# Altium PCB TG21_mach_nut_nhan _V1_ReV.PcbDoc (part 2 of 5)
Units mm, origin at the board's own origin, x right, y up, seen from the top; angles counter-clockwise.
Board outline 300 x 245 mm, 2 copper layers (Top Layer, Bottom Layer), stack 1.671 mm thick; 534 components, 407 nets, 1677 pads, 2608 vias.
Unrouted connection lines stored in the file: 3.
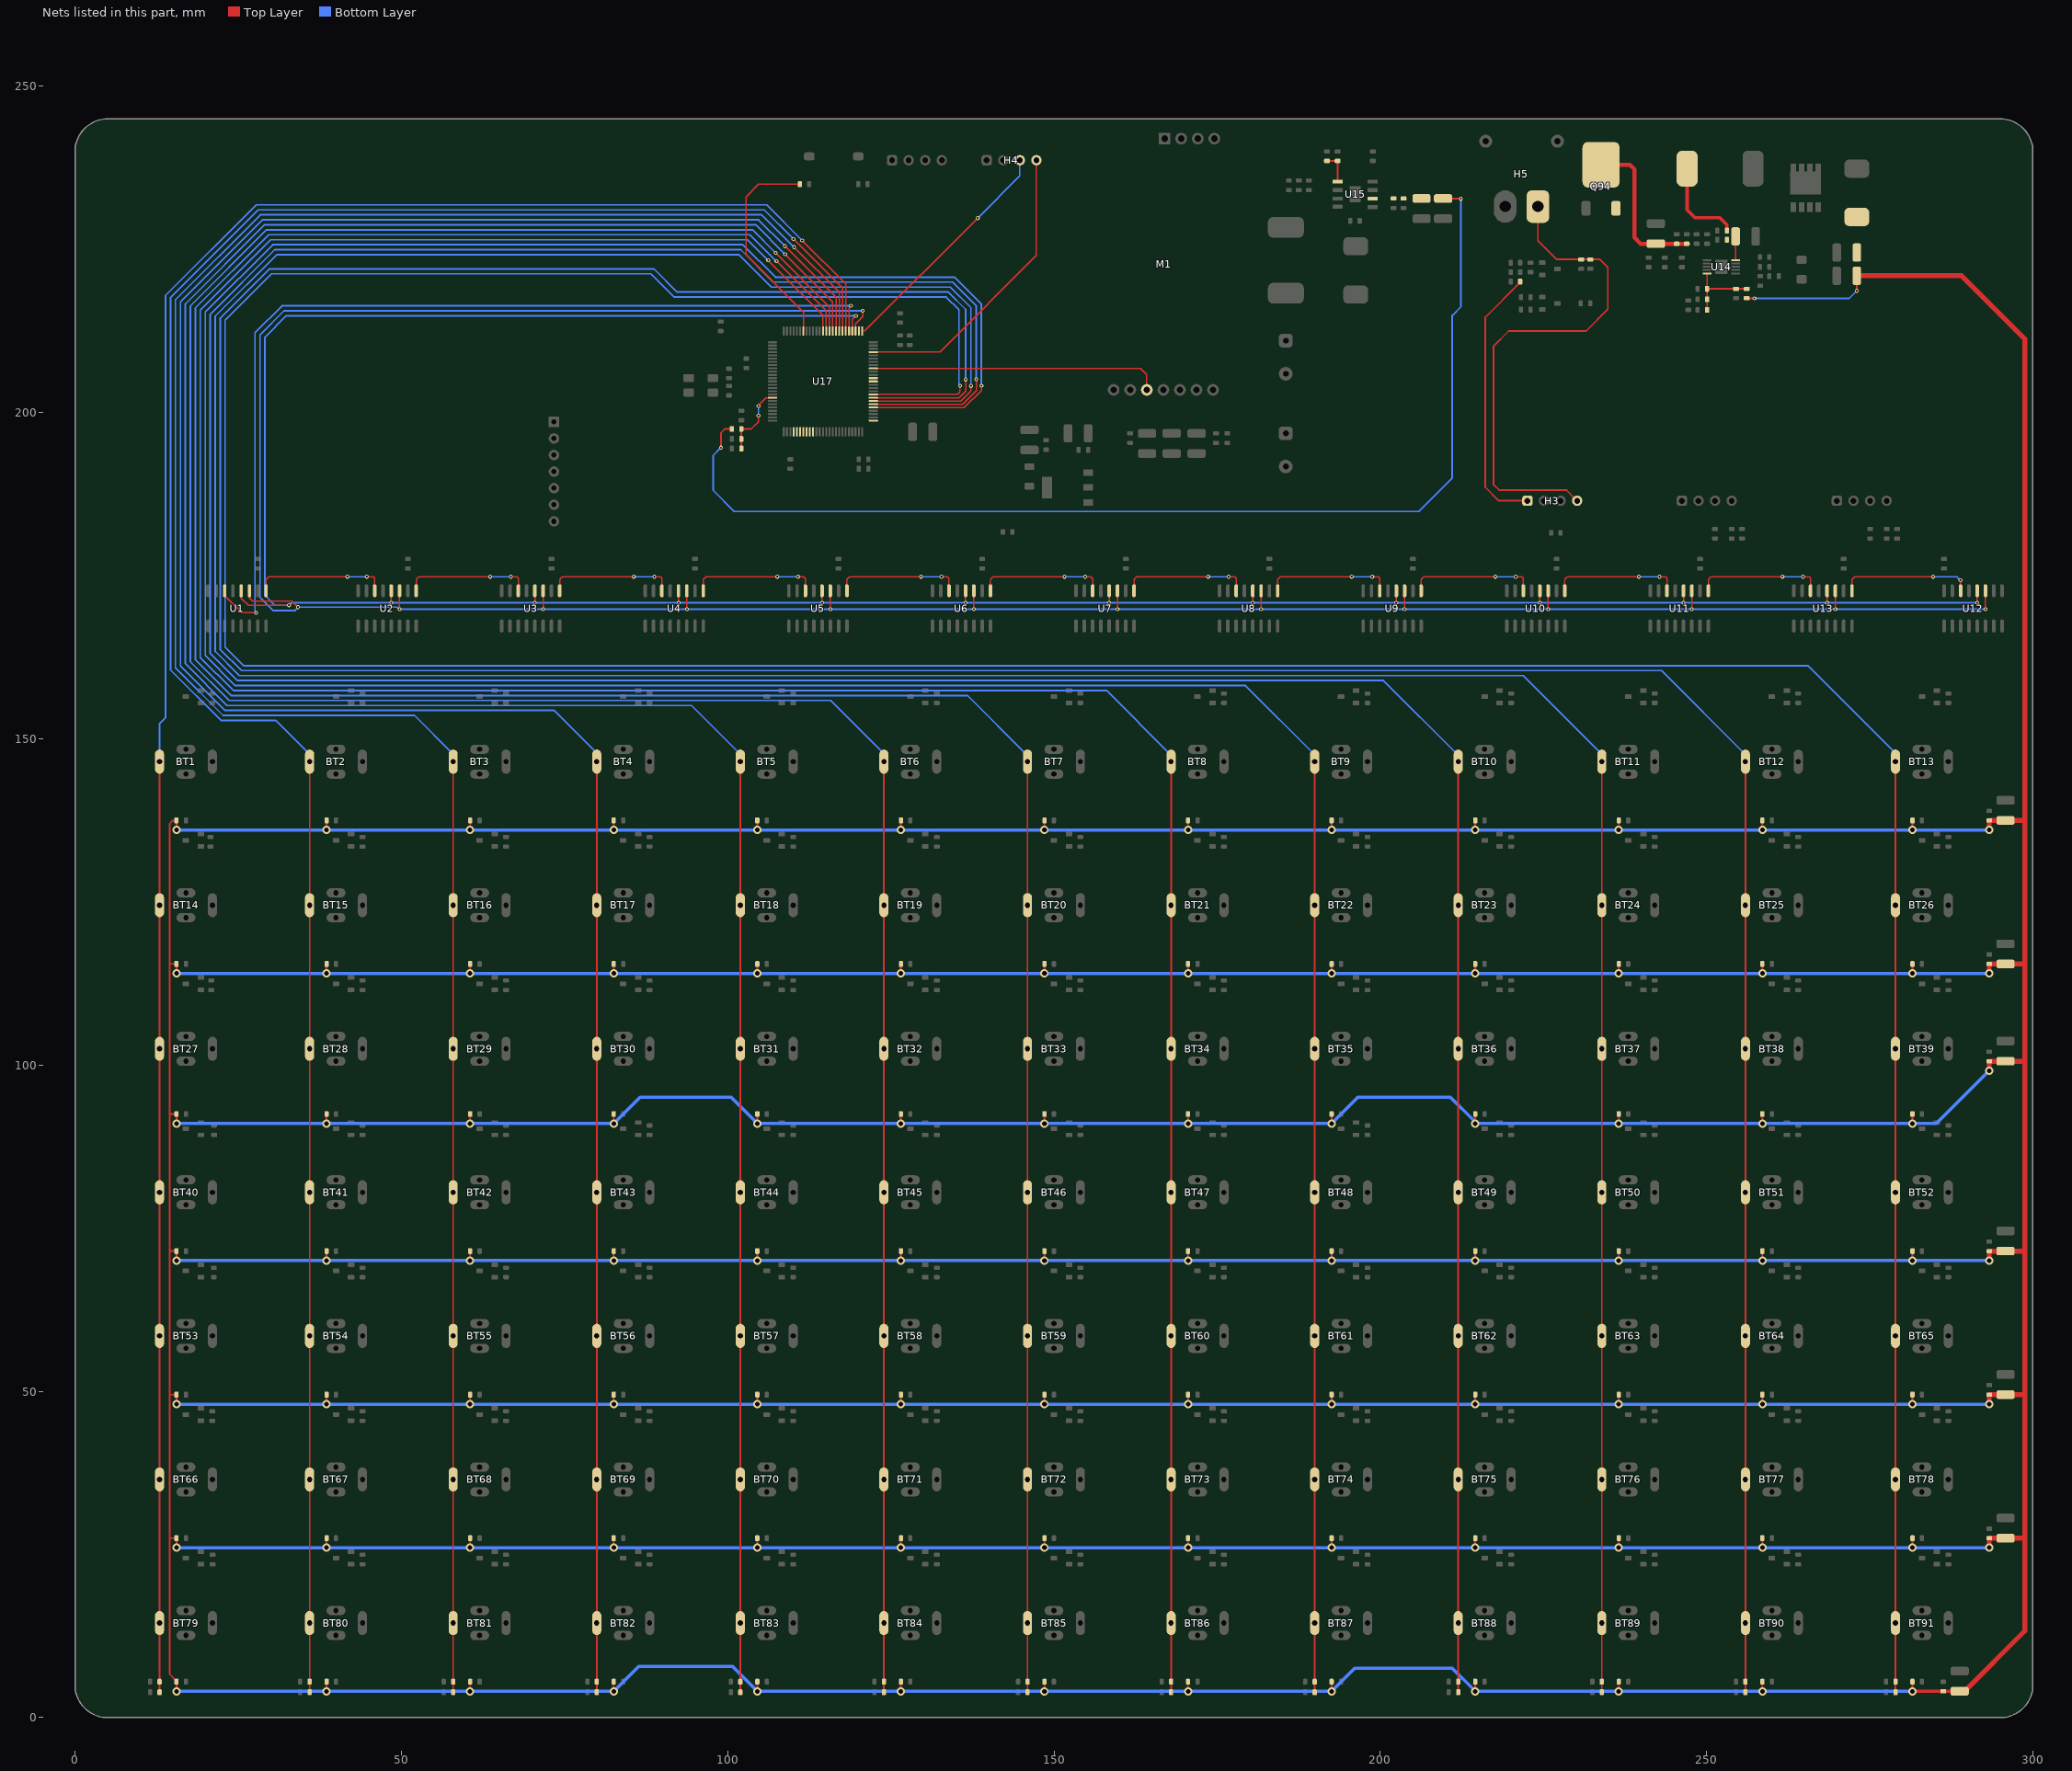
[diagram p2: the nets of this part, all layers, seen from the top]

## Part data
BT1 BT2 BT3 BT4 BT5 BT6 BT7 BT8 BT9 BT10 BT11 BT12 BT13 BT14 BT15 BT16 BT17 BT18 BT19 BT20 BT21 BT22 BT23 BT24 BT25 BT26 BT27 BT28 BT29 BT30 BT31 BT32 BT33 BT34 BT35 BT36 BT37 BT38 BT39 BT40 BT41 BT42 BT43 BT44 BT45 BT46 BT47 BT48 BT49 BT50 BT51 BT52 BT53 BT54 BT55 BT56 BT57 BT58 BT59 BT60 BT61 BT62 BT63 BT64 BT65 BT66 BT67 BT68 BT69 BT70 BT71 BT72 BT73 BT74 BT75 BT76 BT77 BT78 BT79 BT80 BT81 BT82 BT83 BT84 BT85 BT86 BT87 BT88 BT89 BT90 BT91: library part "Metal Push Button Switch", ComponentLink1Description=Link
C1 C2 C3 C4 C5 C6 C7 C8 C9 C10 C11 C12 C13 C14 C15 C16 C17 C18 C19 C20 C21 C22 C23 C24 C25 C26 C34 C35 C36 C37 C38 C39 C40 C41 C42 C43 C46 C47 C50 C52 C58 C61 C64 C67 C69 C72 C74 C75 C77 C78 C80 C82 C83 C84 C85 C86 C89: library part "0603 100nF", "100nF ±10% 50V Ceramic Capacitor X7R 0603", LCSC Part #=C14663, Manufacturer=YAGEO, Mfr. Part #=CC0603KRX7R9BB104, Package=0603, ComponentLink1URL=https://www.lcsc.com/product-detail/C14663.html?s_z=n_0603%2520100nF
  C1 C2 C3 C4 C5 C6 C7 C8 C9 C10 C11 C12 C13 C14 C15 C16 C17 C18 C19 C20 C21 C22 C23 C24 C25 C26 C34 C35 C36 C37 C38 C39 C40: ComponentLink1Description=Link
  C41 C42 C43 C46 C47 C50 C52 C58 C61 C64 C67 C69 C72 C74 C75 C77 C78 C80 C82 C83 C84 C85 C86 C89: ComponentLink1Description="LCSC Link"
C27 C28 C29 C30 C31 C32 C33 C59 C63 C71 C73 C76 C87: library part "1210 22uF 25V X7R", "22uF ±10% 25V Ceramic Capacitor X7R 1210", LCSC Part #=C309062, Manufacturer="Samsung Electro-Mechanics", Mfr. Part #=CL32B226KAJNNNE, Package=1210, ComponentLink1URL=https://www.lcsc.com/product-detail/C309062.html?s_z=n_22uF%25201210
  C27 C28 C29 C30 C31 C32 C33: ComponentLink1Description=Link
  C59 C63 C71 C73 C76 C87: ComponentLink1Description="LCSC Link"
C44 C45 C48 C49: library part "1210 10uF 50V", "10uF ±10% 50V Ceramic Capacitor X7R 1210", LCSC Part #=C138687, Manufacturer="Samsung Electro-Mechanics", Mfr. Part #=CL32B106KBJNNNE, Package=1210, ComponentLink1Description="LCSC Link", ComponentLink1URL=https://www.lcsc.com/product-detail/C138687.html?s_z=n_1210%252010uF
C51 C54 C55 C56 C62: library part "0603 100pF", "100pF ±5% 50V Ceramic Capacitor C0G 0603", LCSC Part #=C14858, Manufacturer="Samsung Electro-Mechanics", Mfr. Part #=CL10C101JB8NNNC, Package=0603, ComponentLink1Description="LCSC Link", ComponentLink1URL=https://www.lcsc.com/product-detail/C14858.html?s_z=n_100pF%25200603&spm=wm.ssy.bg.0.xh&lcsc_vid=FVcIBVBRElIPBFdUFgBYX10HEQJbUQVVQANfV1wFQQcxVlNRQ1RWV1NSQ1dXXjsOAxUeFF5JWBYZEEoKFBINSQcJGk4eFQsCAgIaSgADAwAHC0slRVheUFRSQU8GEwkK
C53 C79 C88: library part "0603 1uF", "1uF ±10% 50V Ceramic Capacitor X5R 0603", LCSC Part #=C15849, Manufacturer="Samsung Electro-Mechanics", Mfr. Part #=CL10A105KB8NNNC, Package=0603, ComponentLink1Description="LCSC Link", ComponentLink1URL=https://www.lcsc.com/product-detail/C15849.html?s_z=n_1uF%25200603%25201%2525&spm=wm.ssy.bg.0.xh&lcsc_vid=FVcIBVBRElIPBFdUFgBYX10HEQJbUQVVQANfV1wFQQcxVlNRQlFeXlNXT1hdUDsOAxUeFF5JWBYZEEoKFBINSQcJGk4%3D
C57: library part "0603 10nF", "10nF ±10% 50V Ceramic Capacitor X7R 0603", LCSC Part #=C100042, Manufacturer=YAGEO, Mfr. Part #=CC0603KRX7R9BB103, Package=0603, ComponentLink1Description="LCSC Link", ComponentLink1URL=https://www.lcsc.com/product-detail/C100042.html?s_z=n_0603%252010nF&spm=wm.ssy.bg.0.xh&lcsc_vid=FVcIBVBRElIPBFdUFgBYX10HEQJbUQVVQANfV1wFQQcxVlNRQlFfVVBSRVNYXjsOAxUeFF5JWBYZEEoKFBINSQcJGk4eFQsCAgIaSgADAwAHC0slRFFaV1JQWQkaCgg%3D
C60 C68: library part "10x20 1000uF 35V", "1000uF 35V Aluminum Electrolytic Capacitors Through Hole,D10xL20mm 2000hrs@105℃", Capacitor=1000uF, LCSC Part #=C136014, Manufacturer=Rubycon, Mfr. Part #=35PX1000MEFC10X20, Package="Through Hole,D10xL20mm", Voltage=35V, Assembly Type="DIP Assembly", ComponentLink1Description="LCSC Link", ComponentLink1URL=https://www.lcsc.com/product-detail/C136014.html?s_z=n_35V%25201000uF%2520rubycon, Type=Capacitor
C65 C66: library part "1210 22uF 25V", "22uF ±10% 25V Ceramic Capacitor X7R 1210", LCSC Part #=C309062, Manufacturer="Samsung Electro-Mechanics", Mfr. Part #=CL32B226KAJNNNE, Package=1210, ComponentLink1Description="LCSC Link", ComponentLink1URL=https://www.lcsc.com/product-detail/C309062.html?s_z=n_22uF%25201210
C70: library part "0603 33pF", "33pF ±5% 50V Ceramic Capacitor NP0 0603", LCSC Part #=C107047, Manufacturer=YAGEO, Mfr. Part #=CC0603JRNPO9BN330, Package=0603, ComponentLink1Description="LCSC Link", ComponentLink1URL=https://www.lcsc.com/product-detail/C107047.html?s_z=n_33pF%25200603&spm=wm.ssy.bg.0.xh&lcsc_vid=FVcIBVBRElIPBFdUFgBYX10HEQJbUQVVQANfV1wFQQcxVlNRQ1RWV1xeR1ZZUTsOAxUeFF5JWBYZEEoKFBINSQcJGk4dAgUUFAk%3D
C81 C90: library part "0603 22pF", "22pF ±5% 50V Ceramic Capacitor C0G 0603", LCSC Part #=C1653, Manufacturer="Samsung Electro-Mechanics", Mfr. Part #=CL10C220JB8NNNC, Package=0603, ComponentLink1Description="LCSC Link", ComponentLink1URL=https://www.lcsc.com/product-detail/C1653.html?s_z=n_22pF%252050V%25200603
D1 D2: library part "B560C - 13- F", "Voltage： 60V Current： 5A", LCSC Part #=C85100, Manufacturer=DIODES, Mfr. Part #=B560C-13-F, Package=SMC(DO-214AB), ComponentLink1Description="LCSC Link", ComponentLink1URL=https://www.lcsc.com/product-detail/C85100.html?s_z=n_B560C
F1: library part "1206 Fuse 1A 6V", "Polymeric PTC Resettable Fuse 6V 1A Surface Mount 1206", LCSC Part #=C883129, Manufacturer=BHFUSE, Mfr. Part #=BSMD1206-100-6V, Package=1206, Assembly Type="SMT Assembly", ComponentLink1Description="LCSC Link", ComponentLink1URL=https://www.lcsc.com/product-detail/C883129.html?s_z=n_q_Resettable%2520Fuse%25206V%25201A%25201206&spm=wm.fly.bg.0.xh&lcsc_vid=QQBdBlYAQFFWUgBXTlUPAgFQQQIIBQIHEQIPAgJRQFAxVlNRT1daVVdeT1JfUzsOAxUeFF5JWBYZEEoKFBINSQcJGk4NBhADEA4cHktXRVZADxALGw%3D%3D, ComponentLink2Description=Datasheet, ComponentLink2URL=NO, Type=Fuse
H1 H2 H3 H4 H7: library part "XH2.54 4PZZ", "XH 1 4P -25℃~+85℃ 2.54mm 4 2A 250V 1x4P Through Hole,P=2.54mm Headers, Male Pins RoHS", LCSC Part #=C53201003, Manufacturer=XYECONN, Package="Through Hole,P=2.54mm", Assembly Type="DIP Assembly", ComponentLink1Description="LCSC Link", ComponentLink1URL=https://www.lcsc.com/product-detail/C53201003.html?s_z=n_XH2.54%25204P, ComponentLink2Description=Datasheet, ComponentLink2URL=https://www.lcsc.com/datasheet/C53201003.pdf, Mfr. Part #=XY-XH2.54-4PZZ, Type=Header
H5: "AMASS XT30PW-M30.G.Y", LCSC Part #=C431092, Manufacturer="Changzhou Amass Elec", Assembly Type="DIP Assembly", ComponentLink1Description="LCSC Link", ComponentLink1URL=https://www.lcsc.com/product-detail/C431092.html?s_z=n_q_xt30pw&spm=wm.fly.bg.0.xh&lcsc_vid=QQBdBlYAQFFWUgBXTlUPAgFQQQIIBQIHEQIPAgJRQFAxVlNRT1ddX1xWQlNaUzsOAxUeFF5JWBYZEEoKFBINSQcJGk4eFQsCAgIaSgADAwAHC0slQllfX11TQk8GEwkK, ComponentLink2Description=Datasheet, ComponentLink2URL=https://www.lcsc.com/datasheet/C431092.pdf?spm=wm.sxq.inf.ggs___wm.fly.bg.0.xh&lcsc_vid=QQBdBlYAQFFWUgBXTlUPAgFQQQIIBQIHEQIPAgJRQFAxVlNRT1ddX1xWQlNaUzsOAxUeFF5JWBYZEEoKFBINSQcJGk4eFQsCAgIaSgADAwAHC0slQllfX11TQk8GEwkK, Mfr. Part #=XT30PW-M30.G.Y, Type=Connector/Header
H6: "Cắm", Chung_Loai=Cắm, Don_Vi=Con, Ma_Hang=MH003369, Ten_Linh_Kien="Header 7P XH2.54-7P Đực Thẳng"
L1 L2: library part "CDRH127N 10uH", "5.4A 10uH 21.6mΩ ±20% SMD,12.2x12.2mm Fixed Inductors RoHS", LCSC Part #=C2832085, Manufacturer=MINGSTAR, Mfr. Part #=CDRH127N-100M, Package=SMD,12.2x12.2mm, ComponentLink1Description="LCSC Link", ComponentLink1URL=http://lcsc.com/product-detail/C2832085.html?s_z=n_CDRH127
M1: "8km UART Through Hole RF Transceiver Modules and Modems RoHS", LCSC Part #=C97351, Manufacturer=EBYTE, Mfr. Part #=E32-433T30D, Package="Through Hole", ComponentLink1Description="LCSC Link", ComponentLink1URL=https://www.lcsc.com/product-detail/C97351.html?s_z=n_E32%2520433T30D, ComponentLink2Description=Datasheet, ComponentLink2URL=https://www.lcsc.com/datasheet/C97351.pdf, Type=Module
Q1 Q2 Q3 Q4 Q5 Q6 Q7 Q8 Q9 Q10 Q11 Q12 Q13 Q14 Q15 Q16 Q17 Q18 Q19 Q20 Q21 Q22 Q23 Q24 Q25 Q26 Q27 Q28 Q29 Q30 Q31 Q32 Q33 Q34 Q35 Q36 Q37 Q38 Q39 Q40 Q41 Q42 Q43 Q44 Q45 Q46 Q47 Q48 Q49 Q50 Q51 Q52 Q53 Q54 Q55 Q56 Q57 Q58 Q59 Q60 Q61 Q62 Q63 Q64 Q65 Q66 Q67 Q68 Q69 Q70 Q71 Q72 Q73 Q74 Q75 Q76 Q77 Q78 Q79 Q80 Q81 Q82 Q83 Q84 Q85 Q86 Q87 Q88 Q89 Q90 Q91: "N-Channel 60V 3A 1.25W Surface Mount SOT-23", LCSC Part #=C347491, Manufacturer=UMW, Package=SOT-23, Assembly=SMT, Category=SI2308A, ComponentLink1Description=Link, ComponentLink1URL=https://www.lcsc.com/product-detail/C347491.html?s_z=n_q_si2308&spm=wm.fly.bg.1.xh&lcsc_vid=Q1VfX1ReRFFaUFJSRgIIUV0CFFgIBFJfT1hdVlwEEVkxVlNRT1daUlxeQlReVzsOAxUeFF5JWBYZEEoKFBINSQcJGk4NBhADEA4cHktXQFFADxALGw%3D%3D, Key Attributes="MOSFET N-CH 60V 3A SOT-23", Mfr. Part #=SI2308A, Type=Mosfet, Unit=Pcs
Q92: library part TPH3R70, LCSC Part #=C556308, Manufacturer=TOSHIBA, Package=SO-8, ComponentLink1Description="LCSC Link", ComponentLink1URL=https://www.lcsc.com/product-detail/C556308.html?s_z=n_tph3R70, Mfr. Part #=TPH3R70APL
Q93 Q95: library part MMBT2222A, "Bipolar (BJT) Transistor NPN 20V 350mA 300MHz 300mW Surface Mount SOT-23", LCSC Part #=C916372, Manufacturer=JSMSEMI, Package=SOT-23, ComponentLink1Description="LCSC Link", ComponentLink1URL=https://www.lcsc.com/product-detail/C916372.html?s_z=n_mmbt222&spm=wm.ssy.bg.4.xh&lcsc_vid=FVcIBVBRElIPBFdUFgBYX10HEQJbUQVVQANfV1wFQQcxVlNRQ1hYVFJVRlldXjsOAxUeFF5JWBYZEEoKFBINSQcJGk4dAgUUFAk%3D, Mfr. Part #=MMBT2222A
Q94: library part IRFR5410TRPBF, "P-Channel 100V 13A 66W Surface Mount DPAK(TO-252AA)", LCSC Part #=C3018, Manufacturer=Infineon, Package=DPAK(TO-252AA), ComponentLink1Description="LCSC Link", ComponentLink1URL=https://www.lcsc.com/product-detail/C3018.html?s_z=n_IRFR5410TRPBF, Mfr. Part #=IRFR5410TRPBF
R1 R2 R3 R4 R5 R6 R7 R8 R9 R10 R11 R12 R13 R27 R28 R29 R30 R31 R32 R33 R34 R35 R36 R37 R38 R39 R53 R54 R55 R56 R57 R58 R59 R60 R61 R62 R63 R64 R65 R79 R80 R81 R82 R83 R84 R85 R86 R87 R88 R89 R90 R91 R105 R106 R107 R108 R109 R110 R111 R112 R113 R114 R115 R116 R117 R131 R132 R133 R134 R135 R136 R137 R138 R139 R140 R141 R142 R143 R157 R158 R159 R160 R161 R162 R163 R164 R165 R166 R167 R168 R169 R197 R199 R200: library part "0603 220R", "100mW 220Ω 75V Thick Film Resistor ±1% ±100ppm/℃ 0603 Chip Resistor - Surface Mount RoHS", LCSC Part #=C313707, Manufacturer=VISHAY, Mfr. Part #=CRCW0603220RFKEAHP, Package=0603, ComponentLink1URL=https://www.lcsc.com/product-detail/C313707.html?s_z=n_0603%2520220R
  R1 R2 R3 R4 R5 R6 R7 R8 R9 R10 R11 R12 R13 R27 R28 R29 R30 R31 R32 R33 R34 R35 R36 R37 R38 R39 R53 R54 R55 R56 R57 R58 R59 R60 R61 R62 R63 R64 R65 R79 R80 R81 R82 R83 R84 R85 R86 R87 R88 R89 R90 R91 R105 R106 R107 R108 R109 R110 R111 R112 R113 R114 R115 R116 R117 R131 R132 R133 R134 R135 R136 R137 R138 R139 R140 R141 R142 R143 R157 R158 R159 R160 R161 R162 R163 R164 R165 R166 R167 R168 R169: ComponentLink1Description=Link
  R197 R199 R200: ComponentLink1Description="LCSC Link"
R14 R15 R16 R17 R18 R19 R20 R21 R22 R23 R24 R25 R26 R40 R41 R42 R43 R44 R45 R46 R47 R48 R49 R50 R51 R52 R66 R67 R68 R69 R70 R71 R72 R73 R74 R75 R76 R77 R78 R92 R93 R94 R95 R96 R97 R98 R99 R100 R101 R102 R103 R104 R118 R119 R120 R121 R122 R123 R124 R125 R126 R127 R128 R129 R130 R144 R145 R146 R147 R148 R149 R150 R151 R152 R153 R154 R155 R156 R170 R171 R172 R173 R174 R175 R176 R177 R178 R179 R180 R181 R182 R183 R184 R185 R186 R187 R188 R189 R190 R191 R192 R193 R194 R195 R196 R198 R205 R207 R213 R215 R218 R222 R223 R224: library part "0603 10K", "100mW 10kΩ 75V Thick Film Resistor ±1% ±100ppm/℃ 0603 Chip Resistor - Surface Mount RoHS", LCSC Part #=C844918, Manufacturer=VISHAY, Mfr. Part #=CRCW060310K0FKEA, Package=0603, ComponentLink1URL=https://www.lcsc.com/product-detail/C844918.html?s_z=n_10K
  R14 R15 R16 R17 R18 R19 R20 R21 R22 R23 R24 R25 R26 R40 R41 R42 R43 R44 R45 R46 R47 R48 R49 R50 R51 R52 R66 R67 R68 R69 R70 R71 R72 R73 R74 R75 R76 R77 R78 R92 R93 R94 R95 R96 R97 R98 R99 R100 R101 R102 R103 R104 R118 R119 R120 R121 R122 R123 R124 R125 R126 R127 R128 R129 R130 R144 R145 R146 R147 R148 R149 R150 R151 R152 R153 R154 R155 R156 R170 R171 R172 R173 R174 R175 R176 R177 R178 R179 R180 R181 R182 R183 R184 R185 R186 R187 R188 R189 R190 R191 R192 R193 R194 R195: ComponentLink1Description=Link
  R196 R198 R205 R207 R213 R215 R218 R222 R223 R224: ComponentLink1Description="LCSC Link"
R201 R206: library part "0603 100K", "100mW 100KΩ 75V Thick Film Resistor ±1% ±100ppm/℃ 0603 Chip Resistor - Surface Mount RoHS", LCSC Part #=C2906980, Manufacturer=FOJAN, Mfr. Part #=FRC0603F1003TS, Package=0603, ComponentLink1Description="LCSC Link", ComponentLink1URL=https://www.lcsc.com/product-detail/C2906980.html?s_z=n_0603%25201%2525%2520100K
R202 R211 R214: library part "0603 150K", "100mW 150KΩ 75V Thick Film Resistor ±1% ±100ppm/℃ 0603 Chip Resistor - Surface Mount RoHS", LCSC Part #=C22807, Manufacturer=UNI-ROYAL, Mfr. Part #=0603WAF1503T5E, Package=0603, ComponentLink1Description="LCSC Link", ComponentLink1URL=https://www.lcsc.com/product-detail/C22807.html?s_z=n_0603%25201%2525%2520150K
R203 R220: library part "0603 2.2R", "100mW 2.2Ω 75V Thick Film Resistor ±1% ±100ppm/℃ 0603 Chip Resistor - Surface Mount RoHS", LCSC Part #=C2933402, Manufacturer=FOJAN, Mfr. Part #=FRC0805F2R20TS, Package=0603, ComponentLink1Description="LCSC Link", ComponentLink1URL=https://www.lcsc.com/product-detail/C2933402.html?s_z=n_2.2R%25201%2525&spm=wm.ssy.bg.6.xh&lcsc_vid=FVcIBVBRElIPBFdUFgBYX10HEQJbUQVVQANfV1wFQQcxVlNRQ1hYUFNVRlVWUzsOAxUeFF5JWBYZEEoKFBINSQcJGk4dAgUUFAk%3D
R204 R216 R217 R221: library part "0603 1K", "100mW 1kΩ 75V Thick Film Resistor ±1% ±100ppm/℃ 0603 Chip Resistor - Surface Mount RoHS", LCSC Part #=C844920, Manufacturer=VISHAY, Mfr. Part #=CRCW06031K00FKEA, Package=0603, ComponentLink1Description="LCSC Link", ComponentLink1URL=https://www.lcsc.com/product-detail/C844920.html?s_z=n_0603%25201K
R208: library part "0603 3K", "3kΩ ±1% 100mW 0603 Thick Film Resistor", LCSC Part #=C17817, Manufacturer=UNI-ROYAL, Mfr. Part #=0805W8F7503T5E, Package=0603, Assembly Type="SMT Assembly", ComponentLink1Description="LCSC Link", ComponentLink1URL=https://www.lcsc.com/product-detail/C2907033.html?s_z=n_3K%25201%2525%25200603&spm=wm.ssy.bg.0.xh&lcsc_vid=FVcIBVBRElIPBFdUFgBYX10HEQJbUQVVQANfV1wFQQcxVlNRQVBYUlZWRlRaUjsOAxUeFF5JWBYZEEoKFBINSQcJGk4dAgUUFAk%3D, ComponentLink2Description=Datasheet, ComponentLink2URL=https://www.lcsc.com/datasheet/C2907033.pdf?spm=wm.sxq.inf.ggs___wm.ssy.bg.0.xh&lcsc_vid=FVcIBVBRElIPBFdUFgBYX10HEQJbUQVVQANfV1wFQQcxVlNRQVBYUlZWRlRaUjsOAxUeFF5JWBYZEEoKFBINSQcJGk4dAgUUFAk%3D, Type=Resistor
R209: library part "0603 30K", "30kΩ ±1% 100mW 0603 Thick Film Resistor", LCSC Part #=C2907025, Manufacturer=FOJAN, Mfr. Part #=FRC0603F3002TS, Package=0603, Assembly Type="SMT Assembly", ComponentLink1Description="LCSC Link", ComponentLink1URL=https://www.lcsc.com/product-detail/C2907025.html?s_z=n_q_t_0603%252030K&spm=wm.fly.bg.0.xh___wm.ssy.tc.0.tz&lcsc_vid=QQBdBlYAQFFWUgBXTlUPAgFQQQIIBQIHEQIPAgJRQFAxVlNRT1daV1JVTlhbUzsOAxUeFF5JWBYZEEoKFBINSQcJGk4dAgUUFAk%3D, ComponentLink2Description=Datasheet, ComponentLink2URL=https://www.lcsc.com/datasheet/C2907025.pdf?spm=wm.sxq.inf.ggs___wm.fly.bg.0.xh&lcsc_vid=QQBdBlYAQFFWUgBXTlUPAgFQQQIIBQIHEQIPAgJRQFAxVlNRT1daV1JVTlhbUzsOAxUeFF5JWBYZEEoKFBINSQcJGk4dAgUUFAk%3D, Type=Resistor
R210 R212: library part "0603 5.6K", "100mW 5.6KΩ 75V Thick Film Resistor ±1% ±100ppm/℃ 0603 Chip Resistor - Surface Mount RoHS", LCSC Part #=C2907046, Manufacturer=FOJAN, Mfr. Part #=FRC0603F5601TS, Package=0603, ComponentLink1Description="LCSC Link", ComponentLink1URL=https://www.lcsc.com/product-detail/C2907046.html?s_z=n_5.6K%25200603&spm=wm.ssy.bg.0.xh&lcsc_vid=FVcIBVBRElIPBFdUFgBYX10HEQJbUQVVQANfV1wFQQcxVlNRQ1RWV1FeQVlfVDsOAxUeFF5JWBYZEEoKFBINSQcJGk4eFQsCAgIaSgADAwAHC0slQ1VdUFNIHxUDCw%3D%3D
R219: library part "0603 220K", "100mW 220KΩ 75V Thick Film Resistor ±1% ±100ppm/℃ 0603 Chip Resistor - Surface Mount RoHS", LCSC Part #=C2907013, Manufacturer=FOJAN, Mfr. Part #=FRC0603F2203TS, Package=0603, ComponentLink1Description="LCSC Link", ComponentLink1URL=https://www.lcsc.com/product-detail/C2907013.html?s_z=n_0603%25201%2525%2520220K
R225: library part "0603 0R", "100mW 0Ω 75V Thick Film Resistor ±1% ±100ppm/℃ 0603 Chip Resistor - Surface Mount RoHS", LCSC Part #=C100044, Manufacturer=YAGEO, Mfr. Part #=RC0603FR-070RL, Package=0603, ComponentLink1Description="LCSC Link", ComponentLink1URL=https://www.lcsc.com/product-detail/C100044.html?s_z=n_0R%25201%2525%25200603&spm=wm.ssy.bg.1.xh&lcsc_vid=FVcIBVBRElIPBFdUFgBYX10HEQJbUQVVQANfV1wFQQcxVlNRQ1RWVFVVRFVbUzsOAxUeFF5JWBYZEEoKFBINSQcJGk4dAgUUFAk%3D
RSNS1: library part "1206 25mR", "1W 25mΩ ±50ppm/℃ ±1% 1206 Chip Resistor - Surface Mount RoHS", LCSC Part #=C46634441, Manufacturer=JIERR, Mfr. Part #=JER1206F1R025, Package=1206, ComponentLink1Description="LCSC Link", ComponentLink1URL=https://www.lcsc.com/product-detail/C46634441.html?s_z=n_25mR%25201W&spm=wm.ssy.bg.1.stp&lcsc_vid=FVcIBVBRElIPBFdUFgBYX10HEQJbUQVVQANfV1wFQQcxVlNRQVBYVlFWT1lXVzsOAxUeFF5JWBYZEEoKFBINSQcJGk4eFQsCAgIaSgADAwAHC0slRlVZVVxIHxUDCw%3D%3D, ComponentLink2Description=Datasheet, ComponentLink2URL=https://www.lcsc.com/datasheet/C46634441.pdf?spm=wm.sxq.inf.ggs___wm.ssy.bg.1.stp&lcsc_vid=FVcIBVBRElIPBFdUFgBYX10HEQJbUQVVQANfV1wFQQcxVlNRQVBYVlFWT1lXVzsOAxUeFF5JWBYZEEoKFBINSQcJGk4eFQsCAgIaSgADAwAHC0slRlVZVVxIHxUDCw%3D%3D
SW1: library part "Switch Tactile 3x6x2.5", "Tactile Switch SPST 250gf 2.5mm SMD (SMT) Tab 6mm x 3.6mm Surface Mount", LCSC Part #=C36498960, Manufacturer=hanxia, Package=SMD,6x3mm, Assembly Type="SMT Assembly", ComponentLink1Description="LCSC Link", ComponentLink1URL=https://www.lcsc.com/product-detail/C36498960.html?s_z=n_q_p_3x6x2.5&spm=wm.ssy.bg.0.xh&lcsc_vid=QQBdBlYAQFFWUgBXTlUPAgFQQQIIBQIHEQIPAgJRQFAxVlNRT1daU1NWQVBbVTsOAxUeFF5JWBYZEEoKFBINSQcJGk4NBhADEA4cHktXRVZADxALGw%3D%3D, ComponentLink2Description=Datasheet, ComponentLink2URL=https://www.lcsc.com/datasheet/C36498960.pdf?spm=wm.sxq.inf.ggs___wm.ssy.bg.0.xh&lcsc_vid=QQBdBlYAQFFWUgBXTlUPAgFQQQIIBQIHEQIPAgJRQFAxVlNRT1daU1NWQVBbVTsOAxUeFF5JWBYZEEoKFBINSQcJGk4NBhADEA4cHktXRVZADxALGw%3D%3D, Mfr. Part #="HX 3x6x2.5A-2.5N", Type=Switch
U1 U2 U3 U4 U5 U6 U7 U8 U9 U10 U11 U12 U13: "2V~6V 1 100ns@5V,50pF Serial-to-Serial or Parallel SOP-16 Shift Registers RoHS", LCSC Part #=C18164493, Manufacturer=GR, Mfr. Part #=74HC595, Package=SOP-16, Assembly=SMT, categoty=74HC595, ComponentLink1Description=Link, ComponentLink1URL=https://www.lcsc.com/product-detail/C18164493.html?s_z=n_q_x_74hc595&spm=wm.ssy.em.0.tz&lcsc_vid=Q1VfX1ReRFFaUFJSRgIIUV0CFFgIBFJfT1hdVlwEEVkxVlNRT1ddX1RVRFFcVjsOAxUeFF5JWBYZEEoKFBINSQcJGk4%3D, Key Attributes="8-bit CMOS shift register", Type=IC, Unit=Pcs
U14: library part TPS40210DGQR, "1 MSOP-10-EP DC DC Switching Controllers RoHS", LCSC Part #=C14728, Manufacturer=TI, Package=MSOP-10-EP, Assembly Type="SMT Assembly", ComponentLink1Description="LCSC Link", ComponentLink1URL=https://www.lcsc.com/product-detail/C14728.html?s_z=n_TPS40210&spm=wm.ssy.bg.0.xh&lcsc_vid=FVcIBVBRElIPBFdUFgBYX10HEQJbUQVVQANfV1wFQQcxVlNRQVBbX1FeRllYUDsOAxUeFF5JWBYZEEoKFBINSQcJGk4dAgUUFAk%3D, ComponentLink2Description=Datasheet, ComponentLink2URL=https://www.lcsc.com/datasheet/C14728.pdf?spm=wm.sxq.inf.ggs___wm.ssy.bg.0.xh&lcsc_vid=FVcIBVBRElIPBFdUFgBYX10HEQJbUQVVQANfV1wFQQcxVlNRQVBbX1FeRllYUDsOAxUeFF5JWBYZEEoKFBINSQcJGk4dAgUUFAk%3D, Mfr. Part #=TPS40210DGQR, Type=IC
U15: library part TPS54360, "60V Input, 3.5A Output Step-Down DC-DC Converter", LCSC Part #=C44377, Manufacturer=TI, Package=SOIC-8-EP, ComponentLink1Description="LCSC Link", ComponentLink1URL=https://www.lcsc.com/product-detail/C44377.html?s_z=n_tps54360&spm=wm.ssy.bg.0.xh&lcsc_vid=FVcIBVBRElIPBFdUFgBYX10HEQJbUQVVQANfV1wFQQcxVlNRQ1RWV1ZTTlRdVzsOAxUeFF5JWBYZEEoKFBINSQcJGk4dAgUUFAk%3D, Mfr. Part #=TPS54360DDAR
U16: library part AMS1117, "1.2A Fixed 3.3V Positive 15V SOT-223 Voltage Regulators - Linear, Low Drop Out (LDO) Regulators ROHS"
X1: library part "Crystal 5032 4P 8MhZ", "Crystal 8MHz ±20ppm 12pF SMD5032-4P", LCSC Part #=C5181482, Manufacturer=SOSET, Mfr. Part #="5032 8M 12PF 20PPM 4P", Package=SMD5032-4P, ComponentLink1Description="LCSC Link", ComponentLink1URL=https://www.lcsc.com/product-detail/C5181482.html?s_z=n_5032%25208m

## Via types
v1: diameter 0.6, hole 0.3, Top Layer to Bottom Layer, tented both sides, 2488 vias
v2: diameter 1.27, hole 0.711, Top Layer to Bottom Layer, tented both sides, 97 vias
v3: diameter 0.7, hole 0.3, Top Layer to Bottom Layer, tented both sides, 23 vias

## Nets (pads, with @x,y where several pads share a name; then routed paths per layer and width w, separated by ;. In a path a pad name is that pad's centre, name@x,y a point inside that pad or via, vN(x,y) a via of type N, cw(c..) or ccw(c..) an arc to the next point about the centre after c; other vN are vias at no path point)
+24VDC: C27.2 C28.2 C29.2 C30.2 C31.2 C32.2 C33.2 C34.2 C35.2 C36.2 C37.2 C38.2 C39.2 C40.2 C44.2 C45.2 D1.2 R1.1 R2.1 R3.1 R4.1 R5.1 R6.1 R7.1 R8.1 R9.1 R10.1 R11.1 R12.1 R13.1 R27.1 R28.1 R29.1 R30.1 R31.1 R32.1 R33.1 R34.1 R35.1 R36.1 R37.1 R38.1 R39.1 R53.1 R54.1 R55.1 R56.1 R57.1 R58.1 R59.1 R60.1 R61.1 R62.1 R63.1 R64.1 R65.1 R79.1 R80.1 R81.1 R82.1 R83.1 R84.1 R85.1 R86.1 R87.1 R88.1 R89.1 R90.1 R91.1 R105.1 R106.1 R107.1 R108.1 R109.1 R110.1 R111.1 R112.1 R113.1 R114.1 R115.1 R116.1 R117.1 R131.1 R132.1 R133.1 R134.1 R135.1 R136.1 R137.1 R138.1 R139.1 R140.1 R141.1 R142.1 R143.1 R157.1 R158.1 R159.1 R160.1 R161.1 R162.1 R163.1 R164.1 R165.1 R166.1 R167.1 R168.1 R169.1 R206.2 | length 2530.5
  Top Layer w0.25: R206.2@256.154,217.515 257.312,217.515 v1(257.327,217.5) ; v1(273.025,218.669) C44.2@273.025,220.962
  Top Layer w0.254: v2(15.543,4.041) 15.55,4.041 R157.1@15.55,5.5 15.55,5.625 14.503,6.672 14.503,27.521 ; v2(15.543,26.041) 15.55,26.041 R131.1@15.55,27.5 14.524,27.5 14.503,27.521 ; v2(15.543,48.041) 15.55,48.041 R105.1@15.55,49.5 14.523,49.5 14.503,49.519 ; v2(15.543,70.041) 15.55,70.041 R79.1@15.55,71.5 14.514,71.5 14.503,71.489 ; v2(15.543,91.045) 15.55,91.045 R53.1@15.55,92.503 14.518,92.503 14.503,92.488 ; v2(15.543,114.041) 15.55,114.041 R27.1@15.55,115.5 14.506,115.5 14.503,115.498 ; v2(15.543,136.041) 15.55,136.041 R1.1@15.55,137.5 15.515,137.465 14.961,137.465 14.503,137.008 14.503,115.498 ; R158.1@38.55,5.5 38.55,4.041 v2(38.558,4.041) ; R132.1@38.55,27.5 38.55,26.041 v2(38.558,26.041) ; R106.1@38.55,49.5 38.55,48.041 v2(38.558,48.041) ; R80.1@38.55,71.5 38.55,70.041 v2(38.558,70.041) ; R54.1@38.55,92.503 38.55,91.045 v2(38.558,91.045) ; R28.1@38.55,115.5 38.55,114.041 v2(38.558,114.041) ; R2.1@38.55,137.5 38.55,136.041 v2(38.558,136.041) ; v2(60.54,4.041) 60.55,4.041 R159.1@60.55,5.5 ; v2(60.54,26.041) 60.55,26.041 R133.1@60.55,27.5 ; v2(60.54,48.041) 60.55,48.041 R107.1@60.55,49.5 ; v2(60.54,70.041) 60.55,70.041 R81.1@60.55,71.5 ; v2(60.54,91.045) 60.55,91.045 R55.1@60.55,92.503 ; v2(60.54,114.041) 60.55,114.041 R29.1@60.55,115.5 ; v2(60.54,136.041) 60.55,136.041 R3.1@60.55,137.5 ; R160.1@82.55,5.5 82.55,4.041 v2(82.564,4.041) ; R134.1@82.55,27.5 82.55,26.041 v2(82.564,26.041) ; R108.1@82.55,49.5 82.55,48.041 v2(82.564,48.041) ; R82.1@82.55,71.5 82.55,70.041 v2(82.564,70.041) ; R56.1@82.55,92.503 82.55,91.045 v2(82.564,91.045) ; R30.1@82.55,115.5 82.55,114.041 v2(82.564,114.041) ; R4.1@82.55,137.5 82.55,136.041 v2(82.564,136.041) ; R161.1@104.55,5.5 104.55,4.041 v2(104.556,4.041) ; R135.1@104.55,27.5 104.55,26.041 v2(104.556,26.041) ; R109.1@104.55,49.5 104.55,48.041 v2(104.556,48.041) ; R83.1@104.55,71.5 104.55,70.041 v2(104.556,70.041) ; R57.1@104.55,92.503 104.55,91.045 v2(104.556,91.045) ; R31.1@104.55,115.5 104.55,114.041 v2(104.556,114.041) ; R5.1@104.55,137.5 104.55,136.041 v2(104.556,136.041) ; v2(126.541,4.041) 126.55,4.041 R162.1@126.55,5.5 ; v2(126.541,26.041) 126.55,26.041 R136.1@126.55,27.5 ; v2(126.541,48.041) 126.55,48.041 R110.1@126.55,49.5 ; v2(126.541,70.041) 126.55,70.041 R84.1@126.55,71.5 ; v2(126.541,91.045) 126.55,91.045 R58.1@126.55,92.503 ; v2(126.541,114.041) 126.55,114.041 R32.1@126.55,115.5 ; v2(126.541,136.041) 126.55,136.041 R6.1@126.55,137.5 ; R163.1@148.55,5.5 148.55,4.041 v2(148.553,4.041) ; R137.1@148.55,27.5 148.55,26.041 v2(148.553,26.041) ; R111.1@148.55,49.5 148.55,48.041 v2(148.553,48.041) ; R85.1@148.55,71.5 148.55,70.041 v2(148.553,70.041) ; R59.1@148.55,92.503 148.55,91.045 v2(148.553,91.045) ; R33.1@148.55,115.5 148.55,114.041 v2(148.553,114.041) ; R7.1@148.55,137.5 148.55,136.041 v2(148.553,136.041) ; R164.1@170.55,5.5 170.55,4.041 v2(170.559,4.041) ; R138.1@170.55,27.5 170.55,26.041 v2(170.559,26.041) ; R112.1@170.55,49.5 170.55,48.041 v2(170.559,48.041) ; R86.1@170.55,71.5 170.55,70.041 v2(170.559,70.041) ; R60.1@170.55,92.503 170.55,91.045 v2(170.559,91.045) ; R34.1@170.55,115.5 170.55,114.041 v2(170.559,114.041) ; R8.1@170.55,137.5 170.55,136.041 v2(170.559,136.041) ; R165.1@192.55,5.5 192.55,4.041 v2(192.555,4.041) ; R139.1@192.55,27.5 192.55,26.041 v2(192.555,26.041) ; R113.1@192.55,49.5 192.55,48.041 v2(192.555,48.041) ; R87.1@192.55,71.5 192.55,70.041 v2(192.555,70.041) ; R61.1@192.55,92.503 192.55,91.045 v2(192.555,91.045) ; R35.1@192.55,115.5 192.55,114.041 v2(192.555,114.041) ; R9.1@192.55,137.5 192.55,136.041 v2(192.555,136.041) ; R166.1@214.55,5.5 214.55,4.041 v2(214.552,4.041) ; R140.1@214.55,27.5 214.55,26.041 v2(214.552,26.041) ; R114.1@214.55,49.5 214.55,48.041 v2(214.552,48.041) ; R88.1@214.55,71.5 214.55,70.041 v2(214.552,70.041) ; R62.1@214.55,92.503 214.55,91.045 v2(214.552,91.045) ; R36.1@214.55,115.5 214.55,114.041 v2(214.552,114.041) ; R10.1@214.55,137.5 214.55,136.041 v2(214.552,136.041) ; v2(236.548,4.041) 236.55,4.041 R167.1@236.55,5.5 ; v2(236.548,26.041) 236.55,26.041 R141.1@236.55,27.5 ; v2(236.548,48.041) 236.55,48.041 R115.1@236.55,49.5 ; v2(236.548,70.041) 236.55,70.041 R89.1@236.55,71.5 ; v2(236.548,91.045) 236.55,91.045 R63.1@236.55,92.503 ; v2(236.548,114.041) 236.55,114.041 R37.1@236.55,115.5 ; v2(236.548,136.041) 236.55,136.041 R11.1@236.55,137.5 ; v2(258.545,4.041) 258.55,4.041 R168.1@258.55,5.5 ; v2(258.545,26.041) 258.55,26.041 R142.1@258.55,27.5 ; v2(258.545,48.041) 258.55,48.041 R116.1@258.55,49.5 ; v2(258.545,70.041) 258.55,70.041 R90.1@258.55,71.5 ; v2(258.545,91.045) 258.55,91.045 R64.1@258.55,92.503 ; v2(258.545,114.041) 258.55,114.041 R38.1@258.55,115.5 ; v2(258.545,136.041) 258.55,136.041 R12.1@258.55,137.5 ; R169.1@281.55,5.5 281.557,5.5 v2(281.557,4.041) ; R143.1@281.55,27.5 281.557,27.5 v2(281.557,26.041) ; R117.1@281.55,49.5 281.557,49.5 v2(281.557,48.041) ; R91.1@281.55,71.5 281.557,71.5 v2(281.557,70.041) ; R65.1@281.55,92.503 281.557,92.503 v2(281.557,91.045) ; R39.1@281.55,115.5 281.557,115.5 v2(281.557,114.041) ; R13.1@281.55,137.5 281.557,137.5 v2(281.557,136.041) ; C33.2@288.774,4.041 C33.2@289.519,4.041 ; 298.755,100.6 298.755,100.607 ; 298.755,115.508 298.755,115.545 ; 14.503,27.521 14.503,49.519 ; 14.503,49.519 14.503,71.489 ; 14.503,71.489 14.503,92.488 ; 14.503,92.488 14.503,115.498
  Top Layer w0.5: v2(281.557,4.041) C40.2@286.27,4.041 C33.2@288.774,4.041 ; 298.755,49.5 298.755,49.509 ; 298.755,71.5 298.755,71.513
  Top Layer w0.762: C44.2@273.025,220.962 289.07,220.962 298.755,211.277 298.755,137.5 ; C33.2@289.519,4.041 298.755,13.277 298.755,27.5 ; v2(293.306,26.041) C39.2@293.306,27.5 C32.2@295.81,27.5 298.755,27.5 ; v2(293.306,48.041) C38.2@293.306,49.5 C31.2@295.81,49.5 298.755,49.5 298.755,27.5 ; v2(293.306,70.041) C37.2@293.306,71.5 C30.2@295.81,71.5 298.755,71.5 298.755,49.509 ; v2(293.306,99.141) C36.2@293.306,100.6 C29.2@295.81,100.6 298.755,100.6 298.755,71.513 ; v2(293.306,114.041) C35.2@293.306,115.5 C28.2@295.81,115.5 ; v2(293.306,136.041) C34.2@293.306,137.5 C27.2@295.81,137.5 298.755,137.5 ; C28.2@295.818,115.508 298.755,115.508 298.755,100.607 ; 298.755,115.545 298.755,137.5
  Bottom Layer w0.25: v1(257.327,217.5) 271.856,217.5 v1(273.025,218.669)
  Bottom Layer w0.5: v2(15.543,4.041) v2(38.558,4.041) v2(60.54,4.041) v2(82.564,4.041) 86.346,7.823 100.774,7.823 v2(104.556,4.041) v2(126.541,4.041) v2(148.553,4.041) v2(170.559,4.041) v2(192.555,4.041) 196.083,7.569 211.024,7.569 v2(214.552,4.041) v2(236.548,4.041) v2(258.545,4.041) v2(281.557,4.041) ; v2(15.543,26.041) v2(38.558,26.041) v2(60.54,26.041) v2(82.564,26.041) v2(104.556,26.041) v2(126.541,26.041) v2(148.553,26.041) v2(170.559,26.041) v2(192.555,26.041) v2(214.552,26.041) v2(236.548,26.041) v2(258.545,26.041) v2(281.557,26.041) v2(293.306,26.041) ; v2(15.543,48.041) v2(38.558,48.041) v2(60.54,48.041) v2(82.564,48.041) v2(104.556,48.041) v2(126.541,48.041) v2(148.553,48.041) v2(170.559,48.041) v2(192.555,48.041) v2(214.552,48.041) v2(236.548,48.041) v2(258.545,48.041) v2(281.557,48.041) v2(293.306,48.041) ; v2(15.543,70.041) v2(38.558,70.041) v2(60.54,70.041) v2(82.564,70.041) v2(104.556,70.041) v2(126.541,70.041) v2(148.553,70.041) v2(170.559,70.041) v2(192.555,70.041) v2(214.552,70.041) v2(236.548,70.041) v2(258.545,70.041) v2(281.557,70.041) v2(293.306,70.041) ; v2(15.543,91.045) v2(38.558,91.045) v2(60.54,91.045) v2(82.564,91.045) 86.591,95.072 100.529,95.072 v2(104.556,91.045) v2(126.541,91.045) v2(148.553,91.045) v2(170.559,91.045) v2(192.555,91.045) 196.583,95.072 210.744,95.072 214.552,91.264 v2(214.552,91.045) v2(236.548,91.045) v2(258.545,91.045) v2(281.557,91.045) 285.209,91.045 v2(293.306,99.141) ; v2(15.543,114.041) v2(38.558,114.041) v2(60.54,114.041) v2(82.564,114.041) v2(104.556,114.041) v2(126.541,114.041) v2(148.553,114.041) v2(170.559,114.041) v2(192.555,114.041) v2(214.552,114.041) v2(236.548,114.041) v2(258.545,114.041) v2(281.557,114.041) v2(293.306,114.041) ; v2(15.543,136.041) v2(38.558,136.041) v2(60.54,136.041) v2(82.564,136.041) v2(104.556,136.041) v2(126.541,136.041) v2(148.553,136.041) v2(170.559,136.041) v2(192.555,136.041) v2(214.552,136.041) v2(236.548,136.041) v2(258.545,136.041) v2(281.557,136.041) v2(293.306,136.041)
A: U17.29
A1: U1.11 U2.11 U3.11 U4.11 U5.11 U6.11 U7.11 U8.11 U9.11 U10.11 U11.11 U12.11 U13.11 U17.78 | length 443.4
  Top Layer w0.178: U1.11@26.735,172.699 26.76,172.673 26.76,171.589 27.229,171.12 33.228,171.12 v1(34.163,170.185) ; U2.11@49.735,172.474 49.735,169.866 v1(49.749,169.866) ; v1(71.732,169.866) 71.735,169.866 U3.11@71.735,172.474 ; 93.735,171.699 93.75,171.683 93.75,169.866 v1(93.762,169.866) ; U5.11@115.735,172.474 115.735,169.866 v1(115.748,169.866) ; U17.78@119.605,212.5 119.605,213.585 120.701,214.681 v1(120.701,215.595) ; U6.11@137.735,172.474 137.735,169.866 v1(137.744,169.866) ; U7.11@159.735,172.474 159.735,169.866 v1(159.741,169.866) ; U8.11@181.735,172.474 181.735,169.866 v1(181.74,169.866) ; v1(203.733,169.866) U9.11@203.735,172.474 ; v1(225.73,169.866) 225.735,169.866 U10.11@225.735,172.474 ; v1(247.726,169.866) 247.735,169.866 U11.11@247.735,172.474 ; v1(269.731,169.866) 269.735,169.866 U13.11@269.735,172.474 ; v1(292.735,169.866) U12.11@292.735,172.699
  Bottom Layer w0.254: v1(120.701,215.595) 32.023,215.595 28.346,211.919 28.346,171.668 30.348,169.666 33.738,169.666 34.163,170.091 34.163,170.282 34.26,170.185 49.336,170.185 49.655,169.866 v1(71.732,169.866) v1(93.762,169.866) v1(115.748,169.866) v1(137.744,169.866) v1(159.741,169.866) v1(181.74,169.866) v1(203.733,169.866) v1(225.73,169.866) v1(247.726,169.866) v1(269.731,169.866) v1(292.735,169.866)
A2: U1.12 U2.12 U3.12 U4.12 U5.12 U6.12 U7.12 U8.12 U9.12 U10.12 U11.12 U12.12 U13.12 U17.79 | length 428.2
  Top Layer w0.178: U1.12@25.465,172.699 25.465,171.535 25.518,171.481 26.582,170.477 v1(32.791,170.477) ; U2.12@48.465,172.699 48.465,170.866 v1(48.479,170.866) ; v1(70.462,170.866) 70.465,170.866 U3.12@70.465,172.699 ; U4.12@92.465,172.699 92.48,172.699 92.48,170.866 v1(92.492,170.866) ; U5.12@114.465,172.699 114.465,170.866 v1(114.478,170.866) ; U17.79@119.105,212.5 119.101,212.504 119.101,214.287 119.647,214.833 v1(119.659,214.833) ; U6.12@136.465,172.699 136.465,170.866 v1(136.474,170.866) ; U7.12@158.465,172.699 158.465,170.866 v1(158.471,170.866) ; U8.12@180.465,172.699 180.465,170.866 v1(180.47,170.866) ; v1(202.463,170.866) U9.12@202.465,172.699 ; v1(224.46,170.866) 224.465,170.866 U10.12@224.465,172.699 ; v1(246.456,170.866) 246.465,170.866 U11.12@246.465,172.699 ; v1(268.461,170.866) 268.465,170.866 U13.12@268.465,172.699 ; v1(291.465,170.866) U12.12@291.465,172.699
  Bottom Layer w0.254: v1(32.791,170.477) 30.615,170.477 29.108,171.983 29.108,211.557 32.385,214.833 v1(119.659,214.833) ; v1@32.799,170.477 33.188,170.866 v1(48.479,170.866) v1(70.462,170.866) v1(92.492,170.866) v1(114.478,170.866) v1(136.474,170.866) v1(158.471,170.866) v1(180.47,170.866) v1(202.463,170.866) v1(224.46,170.866) v1(246.456,170.866) v1(268.461,170.866) v1(291.465,170.866)
A3: U1.14 U17.80 | length 146.7
  Top Layer w0.178: U1.14@22.925,172.699 22.925,171.974 25.581,169.318 v1(27.757,169.316) ; U17.80@118.605,212.5 118.605,215.976 118.897,216.268 v1(118.897,216.383)
  Bottom Layer w0.254: v1(27.757,169.316) 27.757,169.41 27.584,169.583 27.584,212.235 31.707,216.357 118.872,216.357 v1(118.897,216.383)
ADC_BAT: C77.1 R213.1 R214.1 U17.18 | length 11.2
  Top Layer w0.178: v1(104.724,201.016) 104.724,201.117 105.882,202.275 U17.18@106.88,202.275
  Top Layer w0.254: R213.1@102.097,194.488 C77.1@102.097,195.961 R214.1@102.097,197.485 103.607,197.485 104.724,198.603 v1(104.724,199.542)
  Bottom Layer w0.254: v1(104.724,199.542) v1(104.724,201.016)
AUX1: M1.5 U17.67 | length 44.6
  Top Layer w0.178: U17.67@122.33,206.775 163.252,206.775 164.224,205.803 M1.5@164.224,203.486
AUX2: U17.51
B: U17.30
BAT: H3.1 R215.1 | length 41
  Top Layer w0.254: R215.1@221.439,220.065 221.439,219.94 216.103,214.604 216.103,188.544 218.161,186.487 H3.1@222.555,186.487
BAT+: C78.2 H3.4 H5.1 Q94.3 R219.2 | length 79
  Top Layer w0.254: H5.1@224.154,231.579 224.154,226.366 227.051,223.469 R219.2@230.791,223.469 C78.2@232.183,223.469 233.655,223.469 234.874,222.25 234.874,215.824 231.546,212.496 219.685,212.496 217.373,210.185 217.373,188.951 218.211,188.112 228.549,188.112 H3.4@230.175,186.487
BAT_EN: C43.1 C48.2 C49.2 C50.1 C52.2 C63.1 C64.1 C71.1 C72.2 L1.1 Q94.2 R201.1 R214.2 U14.10 U15.2 | length 216.2
  Top Layer w0.254: v1(98.98,194.619) 98.984,194.623 98.984,196.901 99.568,197.485 R214.2@100.647,197.485 ; C71.1@209.629,232.801 209.647,232.783 212.352,232.783 v1(212.369,232.766) ; C48.2@254.441,227 254.452,226.989 U14.10@254.452,223.337
  Top Layer w0.5: L1.1@247.02,237.388 247.02,231.059 248.183,229.895 251.993,229.895 253.107,228.781 C43.1@253.107,227.882
  Top Layer w0.635: Q94.2@233.832,237.978 238.246,237.978 238.938,237.287 238.938,226.822 239.882,225.877 C49.2@242.234,225.877 C50.1@245.409,225.877 R201.1@246.959,225.877
  Bottom Layer w0.254: v1(98.98,194.619) 98.98,194.611 97.79,193.421 97.79,188.069 101.023,184.836 205.892,184.836 211.023,189.967 211.023,214.884 212.369,216.23 v1(212.369,232.766)
BOOT0: R224.2 U17.94 | length 33.3
  Top Layer w0.178: R224.2@111.056,235.001 104.751,235.001 102.793,233.043 102.793,224.193 111.605,215.381 U17.94@111.605,212.5
BUZZER: U17.77
C: U17.31
C1: BT1.1 BT14.1 BT27.1 BT40.1 BT53.1 BT66.1 BT79.1 C14.2 R183.1 U17.81 | length 336.6
  Top Layer w0.178: v1(111.425,226.371) 118.107,219.689 118.107,212.502 U17.81@118.105,212.5
  Top Layer w0.254: BT1.1@12.95,146.5 BT14.1@12.95,124.5 BT27.1@12.95,102.5 BT40.1@12.95,80.5 BT53.1@12.95,58.5 BT66.1@12.95,36.5 BT79.1@12.95,14.5 12.951,14.499 12.951,3.895 C14.2@12.952,3.894
  Bottom Layer w0.254: BT1.1@12.95,146.5 12.95,152.298 13.868,153.217 13.868,217.916 27.778,231.826 105.971,231.826 v1(111.425,226.371)
C2: BT2.1 BT15.1 BT28.1 BT41.1 BT54.1 BT67.1 BT80.1 C15.2 R184.1 U17.82 | length 347.6
  Top Layer w0.178: v1(110.079,226.6) 117.605,219.074 U17.82@117.605,212.5
  Top Layer w0.254: C15.2@35.95,3.894 R184.1@35.95,5.5 BT80.1@35.95,14.5 BT67.1@35.95,36.5 BT54.1@35.95,58.5 BT41.1@35.95,80.5 BT28.1@35.95,102.5 BT15.1@35.95,124.5 BT2.1@35.95,146.5
  Bottom Layer w0.254: BT2.1@35.95,146.5 35.95,147.65 30.768,152.832 22.362,152.832 14.63,160.563 14.63,217.6 28.094,231.064 105.615,231.064 v1(110.079,226.6)
C3: BT3.1 BT16.1 BT29.1 BT42.1 BT55.1 BT68.1 BT81.1 C16.2 R185.1 U17.83 | length 366.2
  Top Layer w0.178: v1(110.185,225.349) 117.105,218.429 U17.83@117.105,212.5
  Top Layer w0.254: C16.2@57.95,3.894 R185.1@57.95,5.5 BT81.1@57.95,14.5 BT68.1@57.95,36.5 BT55.1@57.95,58.5 BT42.1@57.95,80.5 BT29.1@57.95,102.5 BT16.1@57.95,124.5 BT3.1@57.95,146.5
  Bottom Layer w0.254: BT3.1@57.95,146.5 57.95,147.663 52.019,153.594 22.677,153.594 15.392,160.879 15.392,217.285 28.41,230.302 105.232,230.302 v1(110.185,225.349)
C4: BT4.1 BT17.1 BT30.1 BT43.1 BT56.1 BT69.1 BT82.1 C17.2 R186.1 U17.84 | length 384.8
  Top Layer w0.178: v1(108.788,225.501) 116.605,217.685 U17.84@116.605,212.5
  Top Layer w0.254: C17.2@79.95,3.894 R186.1@79.95,5.5 BT82.1@79.95,14.5 BT69.1@79.95,36.5 BT56.1@79.95,58.5 BT43.1@79.95,80.5 BT30.1@79.95,102.5 BT17.1@79.95,124.5 BT4.1@79.95,146.5
  Bottom Layer w0.254: BT4.1@79.95,146.5 79.95,147.837 73.431,154.356 22.993,154.356 16.154,161.194 16.154,216.969 28.725,229.54 104.75,229.54 v1(108.788,225.501)
C5: BT5.1 BT18.1 BT31.1 BT44.1 BT57.1 BT70.1 BT83.1 C18.2 R187.1 U17.85 | length 403.2
  Top Layer w0.178: v1(108.814,224.257) 116.105,216.965 U17.85@116.105,212.5
  Top Layer w0.254: C18.2@101.95,3.894 R187.1@101.95,5.5 BT83.1@101.95,14.5 BT70.1@101.95,36.5 BT57.1@101.95,58.5 BT44.1@101.95,80.5 BT31.1@101.95,102.5 BT18.1@101.95,124.5 BT5.1@101.95,146.5
  Bottom Layer w0.254: BT5.1@101.95,146.5 101.95,147.65 98.826,150.774 94.482,155.118 23.309,155.118 16.916,161.51 16.916,216.653 29.041,228.778 104.292,228.778 v1(108.814,224.257)
C6: BT6.1 BT19.1 BT32.1 BT45.1 BT58.1 BT71.1 BT84.1 C19.2 R188.1 U17.86 | length 421.8
  Top Layer w0.178: v1(107.377,224.471) 107.377,224.448 115.605,216.221 U17.86@115.605,212.5
  Top Layer w0.254: C19.2@123.95,3.894 R188.1@123.95,5.5 BT84.1@123.95,14.5 BT71.1@123.95,36.5 BT58.1@123.95,58.5 BT45.1@123.95,80.5 BT32.1@123.95,102.5 BT19.1@123.95,124.5 BT6.1@123.95,146.5
  Bottom Layer w0.254: v1(107.377,224.471) 107.354,224.471 103.81,228.016 29.356,228.016 17.678,216.338 17.678,161.826 23.624,155.88 115.799,155.88 123.95,147.728 BT6.1@123.95,146.5
C7: BT7.1 BT20.1 BT33.1 BT46.1 BT59.1 BT72.1 BT85.1 C20.2 R189.1 U17.87 | length 440.3
  Top Layer w0.178: v1(107.493,223.215) 115.105,215.603 U17.87@115.105,212.5
  Top Layer w0.254: C20.2@145.95,3.894 R189.1@145.95,5.5 BT85.1@145.95,14.5 BT72.1@145.95,36.5 BT59.1@145.95,58.5 BT46.1@145.95,80.5 BT33.1@145.95,102.5 BT20.1@145.95,124.5 BT7.1@145.95,146.5
  Bottom Layer w0.254: v1(107.493,223.215) 107.422,223.215 103.384,227.254 29.672,227.254 18.44,216.022 18.44,162.141 23.94,156.642 136.754,156.642 145.95,147.445 BT7.1@145.95,146.5
C8: BT8.1 BT21.1 BT34.1 BT47.1 BT60.1 BT73.1 BT86.1 C21.2 R190.1 U17.88 | length 458.9
  Top Layer w0.178: v1(106.22,223.34) 106.22,223.287 114.605,214.903 U17.88@114.605,212.5
  Top Layer w0.254: C21.2@167.95,3.894 R190.1@167.95,5.5 BT86.1@167.95,14.5 BT73.1@167.95,36.5 BT60.1@167.95,58.5 BT47.1@167.95,80.5 BT34.1@167.95,102.5 BT21.1@167.95,124.5 BT8.1@167.95,146.5
  Bottom Layer w0.254: v1(106.22,223.34) 103.068,226.492 29.988,226.492 19.202,215.706 19.202,162.457 24.256,157.404 158.072,157.404 167.95,147.526 BT8.1@167.95,146.5
C9: BT9.1 BT22.1 BT35.1 BT48.1 BT61.1 BT74.1 BT87.1 C22.2 R191.1 U17.55 | length 530.4
  Top Layer w0.178: U17.55@122.33,200.775 136.259,200.775 138.887,203.403 v1(138.887,204.114)
  Top Layer w0.254: C22.2@189.95,3.894 R191.1@189.95,5.5 BT87.1@189.95,14.5 BT74.1@189.95,36.5 BT61.1@189.95,58.5 BT48.1@189.95,80.5 BT35.1@189.95,102.5 BT22.1@189.95,124.5 BT9.1@189.95,146.5
  Bottom Layer w0.254: v1(138.887,204.114) 138.887,216.629 134.765,220.751 107.312,220.751 102.334,225.73 30.303,225.73 19.964,215.391 19.964,162.773 24.571,158.166 179.375,158.166 189.95,147.591 BT9.1@189.95,146.5
C10: BT10.1 BT23.1 BT36.1 BT49.1 BT62.1 BT75.1 BT88.1 C23.2 R192.1 U17.56 | length 547.9
  Top Layer w0.178: U17.56@122.33,201.275 135.997,201.275 138.1,203.378 v1(138.1,205.105)
  Top Layer w0.254: C23.2@211.95,3.894 R192.1@211.95,5.5 BT88.1@211.95,14.5 BT75.1@211.95,36.5 BT62.1@211.95,58.5 BT49.1@211.95,80.5 BT36.1@211.95,102.5 BT23.1@211.95,124.5 BT10.1@211.95,146.5
  Bottom Layer w0.254: v1(138.1,205.105) 138.1,216.339 134.449,219.989 106.996,219.989 102.018,224.968 30.619,224.968 20.726,215.075 20.726,163.088 24.887,158.928 200.482,158.928 211.95,147.46 BT10.1@211.95,146.5
C11: BT11.1 BT24.1 BT37.1 BT50.1 BT63.1 BT76.1 BT89.1 C24.2 R193.1 U17.57 | length 565.5
  Top Layer w0.178: U17.57@122.33,201.775 135.735,201.775 137.287,203.327 v1(137.287,204.089)
  Top Layer w0.254: C24.2@233.95,3.894 R193.1@233.95,5.5 BT89.1@233.95,14.5 BT76.1@233.95,36.5 BT63.1@233.95,58.5 BT50.1@233.95,80.5 BT37.1@233.95,102.5 BT24.1@233.95,124.5 BT11.1@233.95,146.5
  Bottom Layer w0.254: v1(137.287,204.089) 137.287,205.602 137.277,205.612 137.277,216.084 134.134,219.227 106.681,219.227 101.702,224.206 30.935,224.206 21.488,214.76 21.488,163.404 25.202,159.69 221.894,159.69 233.95,147.634 BT11.1@233.95,146.5
C12: BT12.1 BT25.1 BT38.1 BT51.1 BT64.1 BT77.1 BT90.1 C25.2 R194.1 U17.58 | length 581.8
  Top Layer w0.178: U17.58@122.33,202.275 135.473,202.275 136.474,203.276 v1(136.474,205.08)
  Top Layer w0.254: C25.2@255.95,3.894 R194.1@255.95,5.5 BT90.1@255.95,14.5 BT77.1@255.95,36.5 BT64.1@255.95,58.5 BT51.1@255.95,80.5 BT38.1@255.95,102.5 BT25.1@255.95,124.5 BT12.1@255.95,146.5
  Bottom Layer w0.254: v1(136.474,205.08) 136.474,215.809 133.818,218.465 92.253,218.465 88.697,222.021 29.828,222.021 22.25,214.444 22.25,163.719 25.518,160.452 243.103,160.452 255.95,147.605 BT12.1@255.95,146.5
C13: BT13.1 BT26.1 BT39.1 BT52.1 BT65.1 BT78.1 BT91.1 C26.2 R195.1 U17.59 | length 600.4
  Top Layer w0.178: U17.59@122.33,202.775 135.211,202.775 135.611,203.175 v1(135.611,204.114)
  Top Layer w0.254: C26.2@278.95,3.894 R195.1@278.95,5.5 BT91.1@278.95,14.5 BT78.1@278.95,36.5 BT65.1@278.95,58.5 BT52.1@278.95,80.5 BT39.1@278.95,102.5 BT26.1@278.95,124.5 BT13.1@278.95,146.5
  Bottom Layer w0.254: v1(135.611,204.114) 135.611,204.208 135.458,204.36 135.458,215.748 133.502,217.703 91.821,217.703 88.265,221.259 30.144,221.259 23.012,214.128 23.012,164.035 25.834,161.214 265.532,161.214 278.95,147.795 BT13.1@278.95,146.5
CLK: H4.3 U17.76 | length 36.4
  Top Layer w0.2: U17.76@120.605,212.5 121.034,212.5 v1(138.328,229.794)
  Bottom Layer w0.2: v1(138.328,229.794) 144.78,236.245 H4.3@144.78,238.67
CLK_A: U17.63
CLK_B: U17.64
CP1: U1.9 U2.14 | length 20.6
  Top Layer w0.178: U1.9@29.275,172.699 29.275,174.207 cw(c29.921,174.207) 29.921,174.854 v1(41.732,174.854) ; v1(44.704,174.854) 45.618,174.854 cw(c45.618,174.549) 45.923,174.549 45.923,172.699 U2.14@45.925,172.699
  Bottom Layer w0.178: v1(41.732,174.854) v1(44.704,174.854)
CP2: U2.9 U3.14 | length 19.5
  Top Layer w0.178: U2.9@52.275,172.699 52.275,174.207 cw(c52.921,174.207) 52.921,174.854 v1(63.627,174.854) ; v1(66.777,174.828) 67.615,174.828 cw(c67.615,174.518) 67.925,174.518 U3.14@67.925,172.699
  Bottom Layer w0.178: v1(63.627,174.854) 63.64,174.841 66.764,174.841 v1(66.777,174.828)
CP3: U3.9 U4.14 | length 19.5
  Top Layer w0.178: U3.9@74.275,172.699 74.275,174.207 cw(c74.921,174.207) 74.921,174.854 v1(85.627,174.854) ; v1(88.777,174.828) 89.615,174.828 cw(c89.615,174.518) 89.925,174.518 U4.14@89.925,172.699
  Bottom Layer w0.178: v1(85.627,174.854) 85.64,174.841 88.764,174.841 v1(88.777,174.828)
CP4: U4.9 U5.14 | length 19.5
  Top Layer w0.178: U4.9@96.275,172.699 96.275,174.207 cw(c96.921,174.207) 96.921,174.854 v1(107.627,174.854) ; v1(110.777,174.828) 111.508,174.828 cw(c111.508,174.412) 111.925,174.412 U5.14@111.925,172.699
  Bottom Layer w0.178: v1(107.627,174.854) 107.64,174.841 110.764,174.841 v1(110.777,174.828)
CP5: U5.9 U6.14 | length 19.5
  Top Layer w0.178: U5.9@118.275,172.699 118.275,174.207 cw(c118.921,174.207) 118.921,174.854 v1(129.627,174.854) ; v1(132.777,174.828) 133.542,174.828 cw(c133.542,174.445) 133.925,174.445 U6.14@133.925,172.699
  Bottom Layer w0.178: v1(129.627,174.854) 129.64,174.841 132.764,174.841 v1(132.777,174.828)
CP6: U6.9 U7.14 | length 19.5
  Top Layer w0.178: U6.9@140.275,172.699 140.275,174.207 cw(c140.921,174.207) 140.921,174.854 v1(151.627,174.854) ; v1(154.777,174.828) 155.503,174.828 cw(c155.503,174.407) 155.925,174.407 U7.14@155.925,172.699
  Bottom Layer w0.178: v1(151.627,174.854) 151.64,174.841 154.764,174.841 v1(154.777,174.828)
CP7: U7.9 U8.14 | length 19.5
  Top Layer w0.178: U7.9@162.275,172.699 162.275,174.207 cw(c162.921,174.207) 162.921,174.854 v1(173.627,174.854) ; v1(176.777,174.828) 177.615,174.828 cw(c177.615,174.518) 177.925,174.518 U8.14@177.925,172.699
  Bottom Layer w0.178: v1(173.627,174.854) 173.64,174.841 176.764,174.841 v1(176.777,174.828)
CP8: U8.9 U9.14 | length 19.5
  Top Layer w0.178: U8.9@184.275,172.699 184.275,174.207 cw(c184.921,174.207) 184.921,174.854 v1(195.627,174.854) ; v1(198.777,174.828) 199.615,174.828 cw(c199.615,174.518) 199.925,174.518 U9.14@199.925,172.699
  Bottom Layer w0.178: v1(195.627,174.854) 195.64,174.841 198.764,174.841 v1(198.777,174.828)
CP9: U9.9 U10.14 | length 19.5
  Top Layer w0.178: U9.9@206.275,172.699 206.275,174.207 cw(c206.921,174.207) 206.921,174.854 v1(217.627,174.854) ; v1(220.777,174.828) 221.615,174.828 cw(c221.615,174.518) 221.925,174.518 U10.14@221.925,172.699
  Bottom Layer w0.178: v1(217.627,174.854) 217.64,174.841 220.764,174.841 v1(220.777,174.828)
CP10: U10.9 U11.14 | length 19.5
  Top Layer w0.178: U10.9@228.275,172.699 228.275,174.207 cw(c228.921,174.207) 228.921,174.854 v1(239.627,174.854) ; v1(242.777,174.828) 243.615,174.828 cw(c243.615,174.518) 243.925,174.518 U11.14@243.925,172.699
  Bottom Layer w0.178: v1(239.627,174.854) 239.64,174.841 242.764,174.841 v1(242.777,174.828)
CP11: U11.9 U13.14 | length 19.5
  Top Layer w0.178: U11.9@250.275,172.699 250.275,174.207 cw(c250.921,174.207) 250.921,174.854 v1(261.627,174.854) ; v1(264.777,174.828) 265.615,174.828 cw(c265.615,174.518) 265.925,174.518 U13.14@265.925,172.699
  Bottom Layer w0.178: v1(261.627,174.854) 261.64,174.841 264.764,174.841 v1(264.777,174.828)
CP12: U12.14 U13.9 | length 20.3
  Top Layer w0.178: U13.9@272.275,172.699 272.275,174.207 cw(c272.921,174.207) 272.921,174.854 v1(284.732,174.854) ; v1(288.9,174.295) 288.912,174.282 288.912,172.711 U12.14@288.925,172.699
  Bottom Layer w0.178: v1(284.732,174.854) 288.341,174.854 v1(288.9,174.295)
D: U17.32
DIO: H4.4 U17.72 | length 45.7
  Top Layer w0.2: U17.72@122.33,209.275 132.541,209.275 147.32,224.053 H4.4@147.32,238.67
E: U17.33
F: U17.34
"FB 5V": R209.1 R212.2 U15.5 | length 4.8
  Top Layer w0.254: R209.1@191.843,238.568 R212.2@193.461,238.568 U15.5@193.461,235.401
"FB 24V": C55.2 C56.2 R206.1 R207.2 R208.2 U14.5 | length 11.7
  Top Layer w0.25: R207.2@250.083,215.741 C55.2@250.083,217.353 C56.2@250.083,218.965 ; U14.5@250.083,221.336 C56.2@250.083,218.965 ; R206.1@256.154,218.965 R208.2@254.521,218.965 C56.2@250.083,218.965
G: U17.35